# Altium PCB UPCR_TEC_module.PcbDoc
Units mm, origin at the board's own origin, x right, y up, seen from the top; angles counter-clockwise.
Board outline 70 x 50 mm, 2 copper layers (Top Layer, Bottom Layer); 49 components, 37 nets, 186 pads, 149 vias.
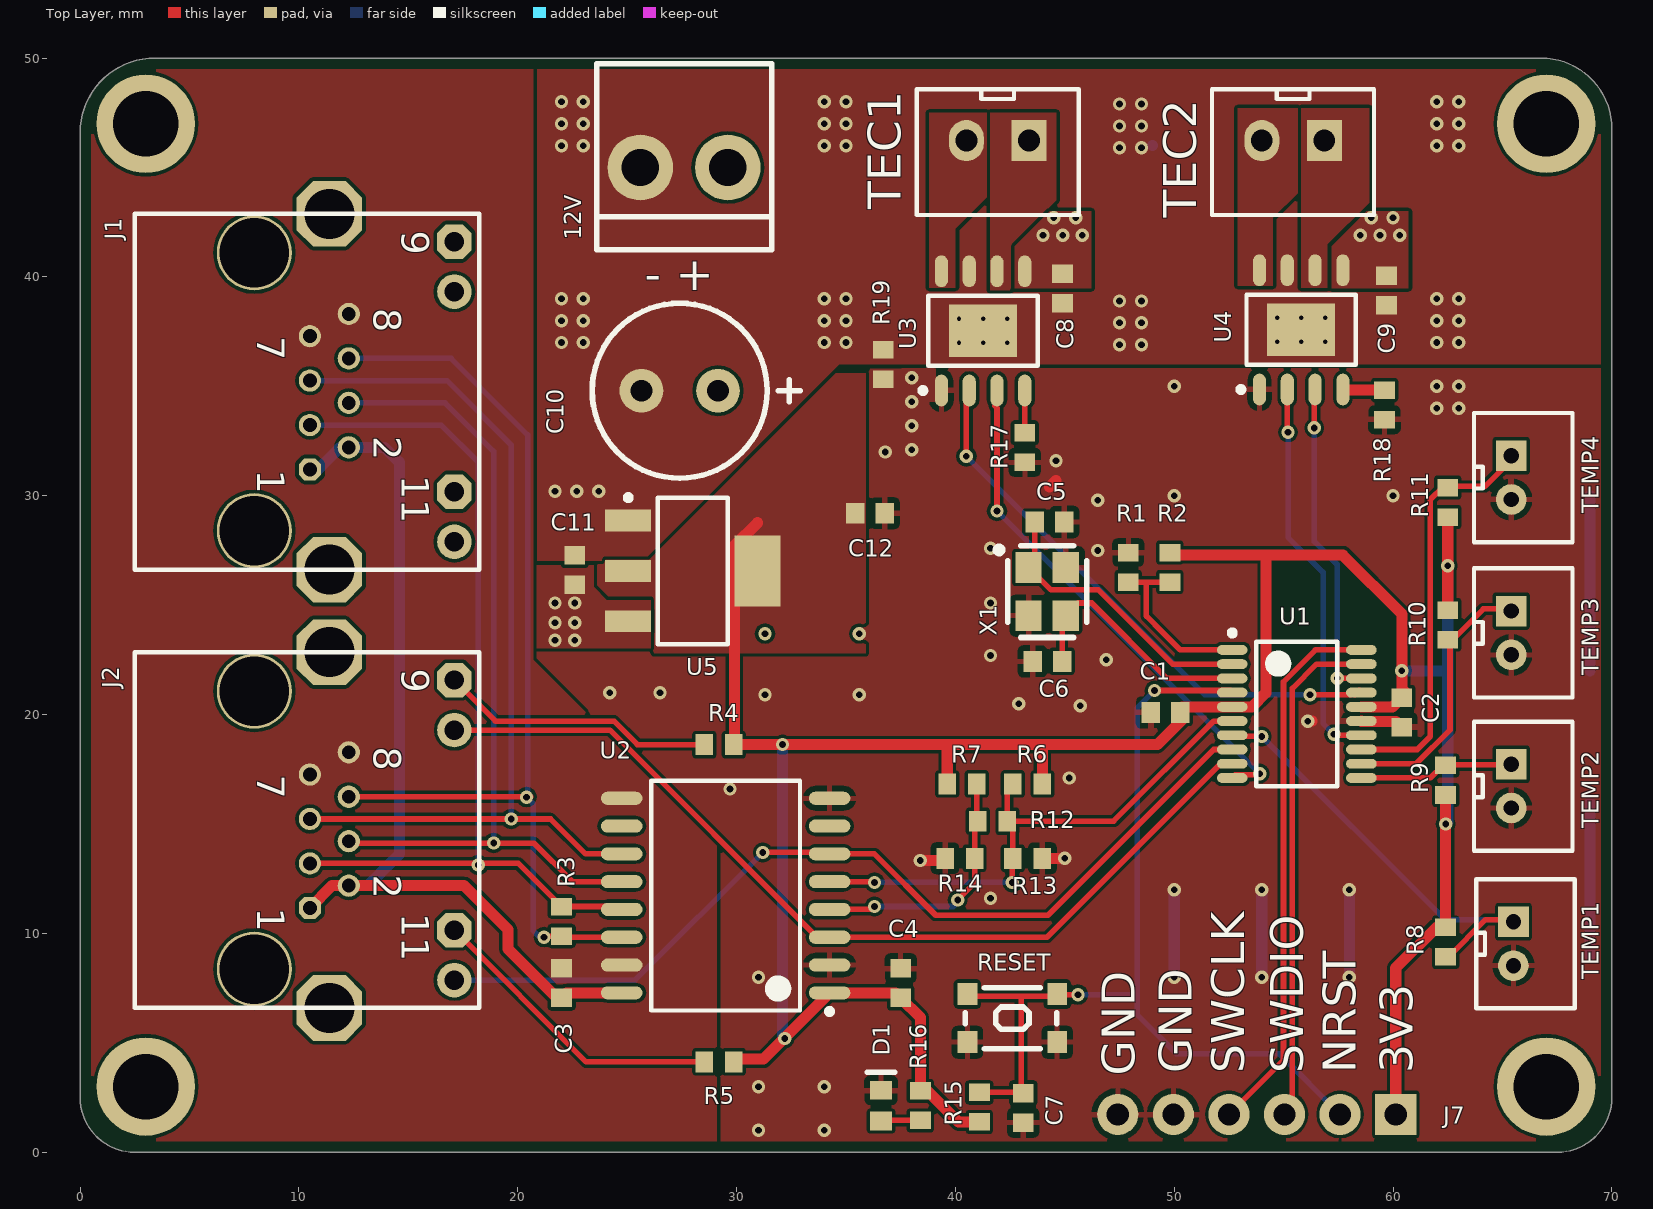
[diagram p0: Top Layer view]
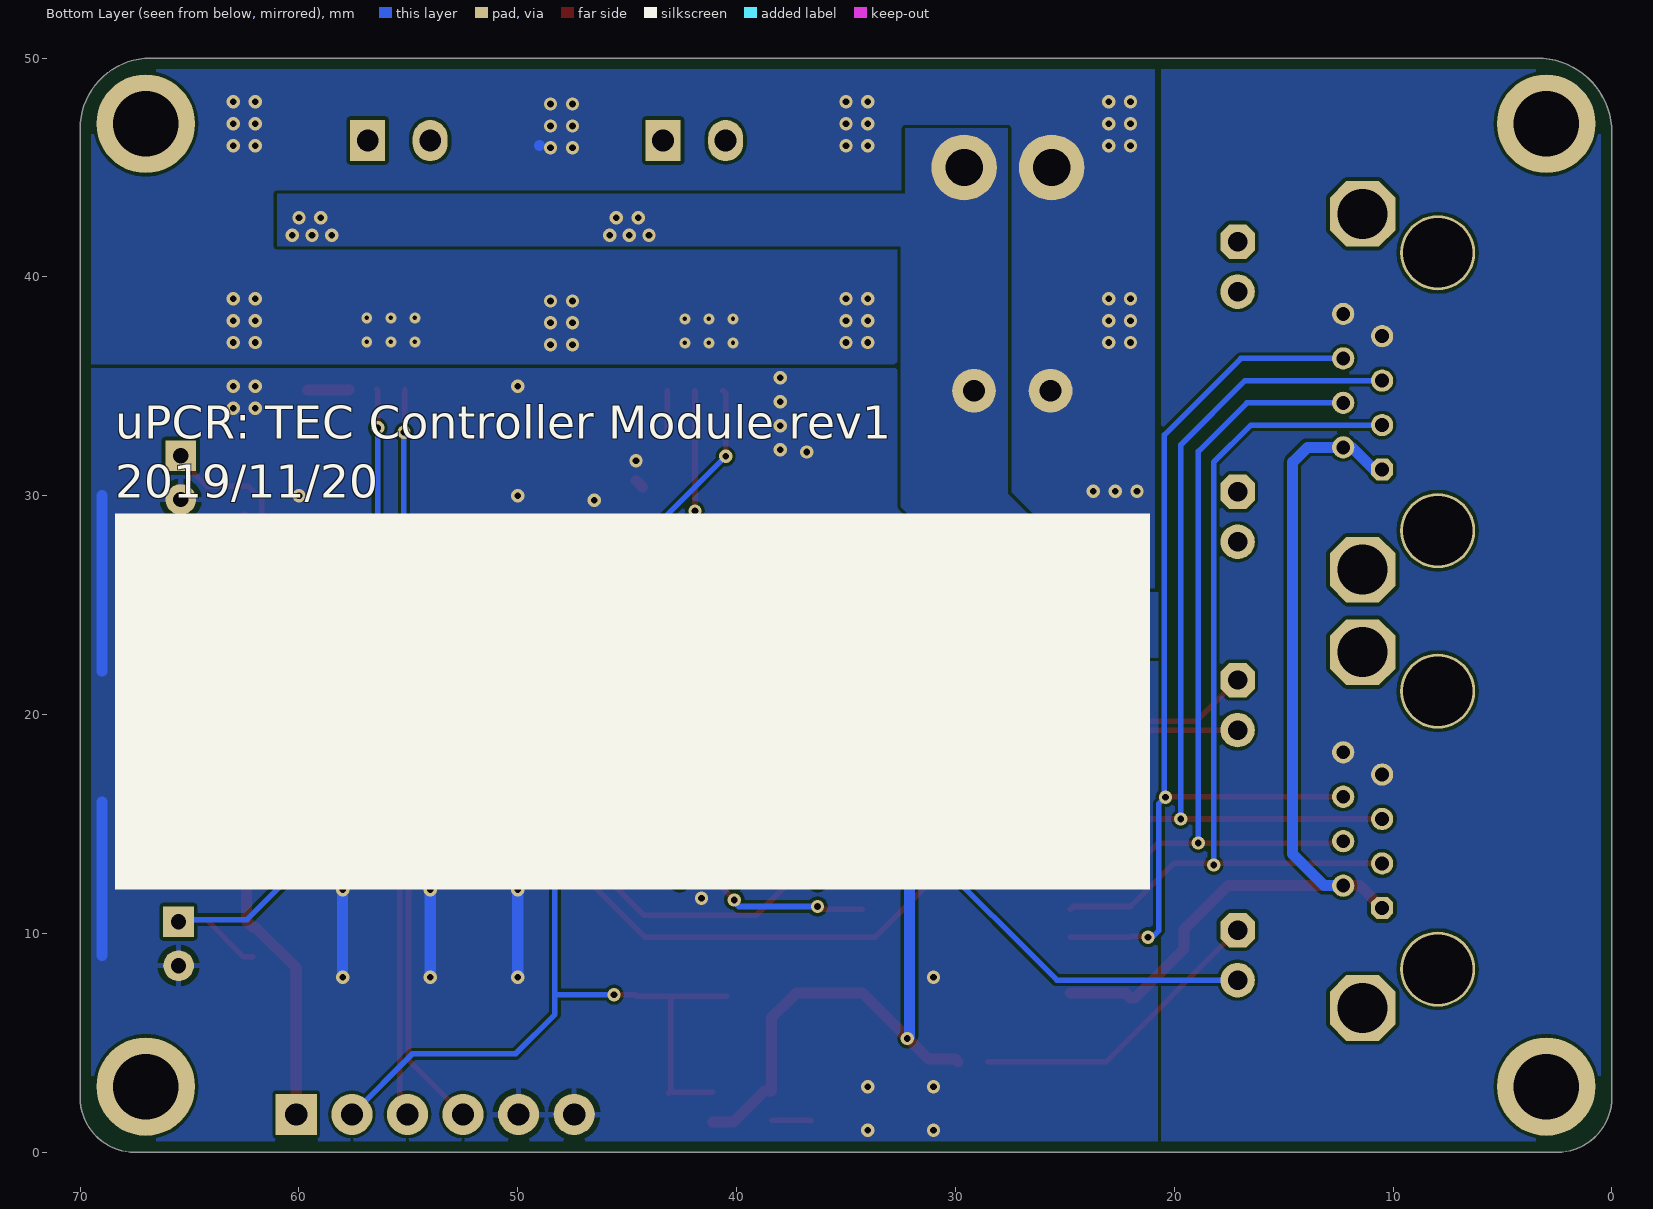
[diagram p1: Bottom Layer view, seen from below]
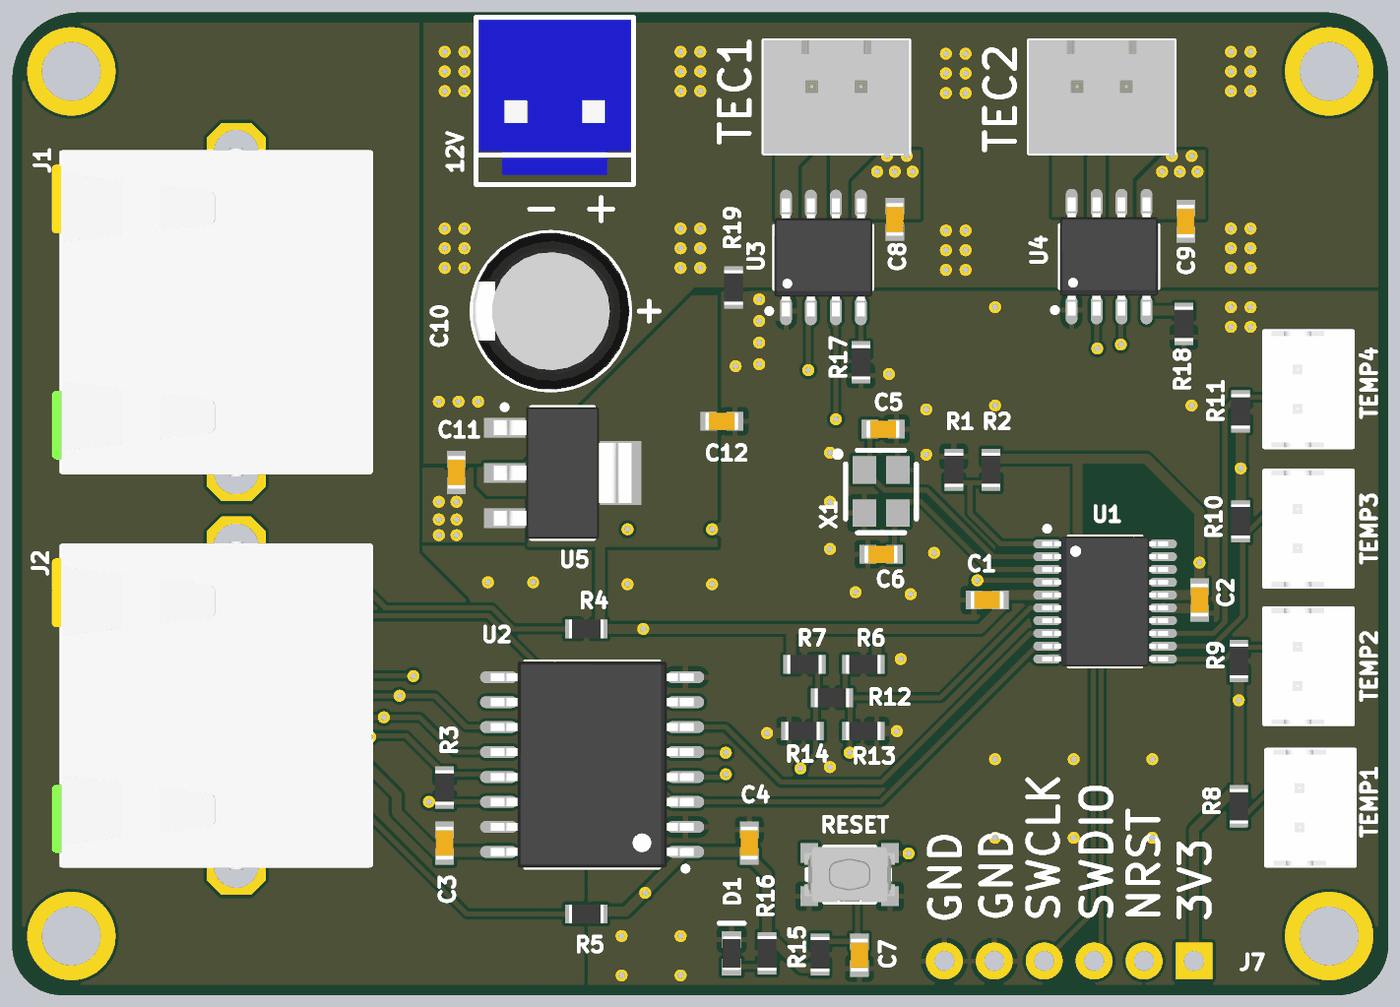
[diagram p2: 3D render of the assembled board from above, using the file's embedded part models]

## Layer stack, top to bottom
Top Solder: solder mask 0.0102, Solder Resist, Dk 3.5
Top Layer: signal copper 0.0356
Dielectric 1: dielectric 0.32, FR-4, Dk 4.8
Bottom Layer: signal copper 0.0356
Bottom Solder: solder mask 0.0102, Solder Resist, Dk 3.5

## Board outline
2.5,0 cw(c2.5,2.5) 0,2.5 0,46.586 cw(c3.414,46.586) 3.414,50 66.775,50 cw(c66.775,46.775) 70,46.775 70,2.5 cw(c67.5,2.5) 67.5,0

## Design rules (kind name [scope] priority, off if disabled: settings)
BoardOutlineClearance [All] p1: gap=0.5 ignorepadtopadclearanceinfootprint=FALSE
Clearance [All] p1: gap=0.152 ignorepadtopadclearanceinfootprint=FALSE except(0: Arc-Hole Track-Hole SMDPad-Hole THPad-Hole Via-Hole Fill-Hole Poly-Hole Region-Hole Text-Hole)
HoleSize [All] p1: absolutevalues=TRUE maxlimit=4 minlimit=0.025 maxpercent=80.000 minpercent=20.000
PolygonConnect PolygonConnect_3 [All vs IsNamedPolygon('GND_L01_P030')] p1: thpad.connectstyle=Relief thpad.reliefconductorwidth=0.254 thpad.reliefentries=4 thpad.polygonreliefangle="90 Angle" thpad.airgapwidth=0.254 smdpad.connectstyle=Relief smdpad.reliefconductorwidth=0.254 smdpad.reliefentries=4 smdpad.polygonreliefangle="90 Angle" smdpad.airgapwidth=0.254 via.connectstyle=Direct via.reliefconductorwidth=0.254 via.reliefentries=4 via.polygonreliefangle="90 Angle" via.airgapwidth=0.254
PolygonConnect PolygonConnect_2 [All vs IsNamedPolygon('GND_L01_P030')] p2: thpad.connectstyle=Relief thpad.reliefconductorwidth=0.254 thpad.reliefentries=4 thpad.polygonreliefangle="90 Angle" thpad.airgapwidth=0.254 smdpad.connectstyle=Direct smdpad.reliefconductorwidth=0.254 smdpad.reliefentries=4 smdpad.polygonreliefangle="90 Angle" smdpad.airgapwidth=0.254 via.connectstyle=Relief via.reliefconductorwidth=0.254 via.reliefentries=4 via.polygonreliefangle="90 Angle" via.airgapwidth=0.254
PolygonConnect PolygonConnect_1 [All vs IsNamedPolygon('GND_L02_P034')] p3: thpad.connectstyle=Relief thpad.reliefconductorwidth=0.254 thpad.reliefentries=4 thpad.polygonreliefangle="90 Angle" thpad.airgapwidth=0.254 smdpad.connectstyle=Relief smdpad.reliefconductorwidth=0.254 smdpad.reliefentries=4 smdpad.polygonreliefangle="90 Angle" smdpad.airgapwidth=0.254 via.connectstyle=Direct via.reliefconductorwidth=0.254 via.reliefentries=4 via.polygonreliefangle="90 Angle" via.airgapwidth=0.254
PolygonConnect [All] p4: connectstyle=Direct reliefconductorwidth=0.254 reliefentries=4 polygonreliefangle="90 Angle" airgapwidth=0.254
RoutingVias [All] p1: holewidth=0.305 width=0.61 viastyle="Through Hole" minholewidth=0.305 minwidth=0.61 maxholewidth=0.305 maxwidth=0.61
SolderMaskExpansion [IsVia] p1: expansion=0 soldermaskfromhole=TRUE
Width [All] p1: maxlimit=1.016 minlimit=0.254 preferedwidth=0.254
29 further rules are at their usual default settings.

## Components (designator, comment, footprint, x,y, rotation, side; value= is the part's Value field where it differs from the comment)
12V "CONN_2P" "JST B2P-VH" 27.6,45 r0 top
C1 "C" C0603 49.6,20.1 r0 top value=100nF
C2 "C" C0603 60.4,20.1 r90 top value=100nF
C3 "C" C0603 22,7.729 r270 top value=100nF
C4 "C" C0603 37.5,7.729 r90 top value=100nF
C5 "C" C0603 44.3,28.8 r180 top value=18pF
C6 "C" C0603 44.2,22.429 r0 top value=18pF
C7 "C" C0603 43.1,2.029 r90 top value=100nF
C8 "C" C0603 44.9,39.475 r90 top value=100nF
C9 "C" C0603 59.7,39.375 r90 top value=100nF
C10 "47uF" CPOL_8x9 27.4,34.8 r270 top
C11 "C" C0603 22.6,26.6 r270 top value=100nF
C12 "C" C0603 36.1,29.2 r180 top value=100nF
D1 "LED" "0603 LED" 36.6,2.129 r90 top
J1 "RJ45_CONN" RJ45_CONN_V1 14.328,34.716 r270 top
J2 "RJ45_CONN" RJ45_CONN_V1 14.328,14.684 r270 top
J7 "CONN_6P" "2.54 6P Header" 60.12,1.729 r180 top
R1 "R" R0603 47.9,26.729 r90 top value=0R
R2 "R" R0603 49.8,26.729 r90 top value=DNP
R3 "R" R0603 22,10.554 r270 top value=120R
R4 "R" R0603 29.2,18.629 r0 top value=3.3K
R5 "R" R0603 29.2,4.129 r0 top value=3.3K
R6 "R" R0603 43.3,16.829 r180 top value=DNP
R7 "R" R0603 40.3,16.829 r0 top value=DNP
R8 "R" R0603 62.4,9.6 r270 top value=10k/0.1%
R9 "R" R0603 62.4,17 r90 top value=10k/0.1%
R10 "R" R0603 62.5,24.1 r270 top value=10k/0.1%
R11 "R" R0603 62.5,29.7 r90 top value=10k/0.1%
R12 "R" R0603 41.7,15.129 r0 top value=DNP
R13 "R" R0603 43.3,13.429 r0 top value=DNP
R14 "R" R0603 40.2,13.429 r180 top value=DNP
R15 "R" R0603 41.097,2.059 r90 top value=10K
R16 "R" R0603 38.4,2.129 r90 top value=3.3K
R17 "R" R0603 43.17,32.199 r90 top value=20k
R18 "R" R0603 59.61,34.15 r90 top value=20k
R19 "R" R0603 36.7,36 r270 top value=0R
RESET "KMR2" KMR2_tact_switch 42.6,6.129 r180 top
TEC1 "CONN_2P" "JST B2B-XH-A - THIN PADS" 43.178,46.229 r180 top
TEC2 "CONN_2P" "JST B2B-XH-A - THIN PADS" 56.678,46.229 r180 top
TEMP1 "CONN_2P" "JST B2B-PH-K-S" 65.5,10.529 r270 top
TEMP2 "CONN_2P" "JST B2B-PH-K-S" 65.4,17.729 r270 top
TEMP3 "CONN_2P" "JST B2B-PH-K-S" 65.4,24.729 r270 top
TEMP4 "CONN_2P" "JST B2B-PH-K-S" 65.4,31.829 r270 top
U1 "STM32F030F4" "STM32F030F4- TSSOP20" 55.6,20.029 r0 top
U2 "ADM2484E" ADM2484-SOIC16 29.5,11.729 r180 top
U3 "DRV8871" "DRV8871- SOIC8" 41.265,37.533 r90 top
U4 "DRV8871" "DRV8871- SOIC8" 55.8,37.579 r90 top
U5 "LM1117 3.3v" SOT223 27.998,26.565 r0 top
X1 "8MHz" CRYSTAL_4P_3.2X2.5 44.195,25.623 r270 top

## Footprints (in the part's own frame and the unit in brackets; to place one, negate y for a bottom-side part, rotate by r counter-clockwise, add the part's x,y. Pads: shape width x height; smd on the part's side, far side on the other; paste and mask are expansions set on the pad)
"2.54 6P Header" [mil] "2.54 6P Header"
  rect 74x74 hole 40: 1(0,0)
  round 74 hole 40: 2(100,0) 3(200,0) 4(300,0) 5(400,0) 6(500,0)
"0603 LED" [mm]
  rect 0.85x1 smd: 1(-0.7,0) 2(0.7,0)
  silkscreen extent 1.52,-0.63 1.52,0.64, body extent -0.87,-0.48 0.87,0.48, height 0.6
ADM2484-SOIC16 [mm] "SOIC, 16-Leads, Body 10.30x7.50mm, Pitch 1.27mm, IPC Medium Density"
  oval 1.9x0.6 smd: 1(-4.75,4.445) 2(-4.75,3.175) 3(-4.75,1.905) 4(-4.75,0.635) 5(-4.75,-0.635) 6(-4.75,-1.905) 7(-4.75,-3.175) 8(-4.75,-4.445) 9(4.75,-4.445) 10(4.75,-3.175) 11(4.75,-1.905) 12(4.75,-0.635) 13(4.75,0.635) 14(4.75,1.905) 15(4.75,3.175) 16(4.75,4.445)
  silkscreen extent -4.88,-5.25 3.4,5.42, body extent -5.16,-5.25 5.16,5.25, height 2.65
C0603 [mm] "Chip Capacitor, 2-Leads, Body 1.60x0.80mm, IPC Medium Density"
  rect 0.85x0.95 smd: 1(-0.675,0) 2(0.675,0)
  body extent -0.85,-0.45 0.85,0.45, height 0.6
CPOL_8x9 [mm] "Electrolytic Capacitor, through hole, 8x9mm"
  round 2 hole 1: 1(0,1.75) 2(0,-1.75)
  silkscreen extent -4,-4 4,5.5, body extent -4,-4 4,4, height 9
CRYSTAL_4P_3.2X2.5 [mm] "CRYSTAL 4P 3.2X2.0"
  rect 1.4x1.2 smd: 1(-1.1,-0.85) 2(1.1,-0.85) 3(1.1,0.85) 4(-1.1,0.85)
  silkscreen extent -2.1,-2.34 2.1,1.8
"DRV8871- SOIC8" [mm] "SOIC, 8-Leads, Body 4.90x3.90mm, Pitch 1.27mm, Thermal Pad 3.10x2.40mm, IPC Medium Density"
  oval 1.45x0.6 smd: 1(-2.725,1.905) 2(-2.725,0.635) 3(-2.725,-0.635) 4(-2.725,-1.905) 5(2.725,-1.905) 6(2.725,-0.635) 7(2.725,0.635) 8(2.725,1.905)
  rect 2.4x3.1 smd: 9(0,0)
  silkscreen extent -2.85,-2.5 1.6,2.88, body extent -3,-2.5 3,2.5, height 1.7
"JST B2B-PH-K-S" [mm] "2 PIN LOCKING HEADER 2.0mm PITCH"
  rect 1.4x1.4 hole 0.7: 1(0,0)
  round 1.4 hole 0.7: 2(2,0)
  silkscreen extent -1.95,-1.7 3.95,2.8, body extent -1.95,-1.7 3.95,2.8, height 6
"JST B2B-XH-A - THIN PADS" [mm] "2 PIN LOCKING HEADER 2.5mm PITCH"
  rect 1.6x1.88 hole 1: 1(-0.178,0)
  oval 1.6x1.88 hole 1: 2(2.678,0)
  silkscreen extent -2.45,-2.35 4.95,3.4, body extent -2.45,-2.35 4.95,3.4, height 7
"JST B2P-VH" [mm]
  round 3 hole 1.7: 1(-2,0) 2(2,0)
  silkscreen extent -4,-3.75 4,4.75, body extent -3.93,-3.75 3.93,4.75, height 3.7
KMR2_tact_switch [mm] "Microminiature SMT Top Actuated"
  rect 0.9x1 smd: 1(-2.05,1.1) 1(2.05,1.1) 2(-2.05,-1.1) 2(2.05,-1.1)
  silkscreen extent -2.03,-1.4 2.16,1.4, body extent -2.3,-1.4 2.3,1.4, height 1.92
R0603 [mm]
  rect 0.8x0.95 smd: 1(-0.675,0) 2(0.675,0)
  body extent -0.87,-0.48 0.87,0.48, height 0.45
RJ45_CONN_V1 [mil]
  oct 40x40 hole 25: 1(138.53,-150.73)
  round 40 hole 25: 2(98.53,-80.73) 3(58.53,-150.73) 4(18.53,-80.73) 5(-21.47,-150.73) 6(-61.47,-80.73) 7(-101.47,-150.73) 8(-141.47,-80.73)
  oct 62x62 hole 35: 9(-271.47,109.27) 11(178.53,109.27)
  round 62 hole 35: 10(-181.47,109.27) 12(268.53,109.27)
  oct 118.11x118.11 hole 90: 13(-321.47,-115.73) 14(318.53,-115.73)
  round 135 hole 125: BO1(-251.47,-250.73) BO2(248.53,-250.73)
  silkscreen extent -321,-466 319,154, body extent -330,-485 327,154, height 581
SOT223 [mm] "SOT223, 4-Leads, Body 6.50x7.00mm (avg), Pitch 2.30mm, IPC Medium Density"
  rect 2.1x1 smd: 1(-2.95,2.3) 2(-2.95,0) 3(-2.95,-2.3)
  rect 2.1x3.25 smd: 4(2.95,0)
  silkscreen extent -3.07,-3.35 1.6,3.47, body extent -3.5,-3.35 3.5,3.35, height 1.8
"STM32F030F4- TSSOP20" [mm] "TSOP, 20-Leads, Body 6.50x4.40mm, Pitch 0.65mm, IPC Medium Density"
  oval 1.4x0.45 smd: 1(-2.95,2.925) 2(-2.95,2.275) 3(-2.95,1.625) 4(-2.95,0.975) 5(-2.95,0.325) 6(-2.95,-0.325) 7(-2.95,-0.975) 8(-2.95,-1.625) 9(-2.95,-2.275) 10(-2.95,-2.925) 11(2.95,-2.925) 12(2.95,-2.275) 13(2.95,-1.625) 14(2.95,-0.975) 15(2.95,-0.325) 16(2.95,0.325) 17(2.95,0.975) 18(2.95,1.625) 19(2.95,2.275) 20(2.95,2.925)
  silkscreen extent -3.07,-3.3 1.85,3.82, body extent -3.2,-3.3 3.2,3.3, height 1.2

## Part data
12V TEC1 TEC2 TEMP1 TEMP2 TEMP3 TEMP4: "Connector, 2P"
C1 C2 C3 C4 C5 C6 C7 C8 C9 C11 C12: "Ceramic Capacitor SMD"
C10: library part C_POL, "Polarized Capacitor"
J7: "Connector, 6P"
R1 R2 R3 R4 R5 R6 R7 R8 R9 R10 R11 R12 R13 R14 R15 R16 R17 R18 R19: "Resistor SMD"
RESET: library part TACT_SWITCH, "Pushbuttons"
U2: "Isolated RS485/RS-422 transciever"
U3 U4: "DRV8871 3.6-A Brushed DC Motor Driver With Internal Current Sense (PWM Control)"
U5: "800 mA 3.3V Low Dropout Linear Voltage Regulator"
X1: library part Crystal_4, "Crystal Oscillator"

## Free pads (board coordinates)
  round 4.5 hole 3: 2(3,3) 2(3,47) 2(67,3) 2(67,47)

## Via types
v1: diameter 0.61, hole 0.305, Top Layer to Bottom Layer, 137 vias
v2: diameter 0.5, hole 0.2, Top Layer to Bottom Layer, 12 vias

## Nets (pads, with @x,y where several pads share a name; then routed paths per layer and width w, separated by ;. In a path a pad name is that pad's centre, name@x,y a point inside that pad or via, vN(x,y) a via of type N, cw(c..) or ccw(c..) an arc to the next point about the centre after c; other vN are vias at no path point)
3V3: C1.2 C2.2 C4.1 C12.2 J7.1 R2.2 R4.2 R5.2 R6.1 R7.1 R8.1 R9.1 R10.1 R11.1 R15.1 R16.2 U1.5 U1.16 U2.1 U5.2 U5.4 | length 127.9
  Top Layer w0.508: R5.2 30,4.254 31.22,4.254 U2.1 37.27,7.284 C4.1 38.4,6.154 R16.2 38.725,2.804 40.145,1.384 R15.1 ; R4.2 R4.2@29.9,18.629 ; 30.948,28.765 29.9,27.717 R4.2@29.9,18.629 ; R7.1 39.625,18.629 ; R6.1 43.975,18.629 ; R2.2 49.904,27.3 54.2,27.3 ; U1.16 59.979,20.354 C2.2 60.6,20.975 60.4,21.175 v1(60.4,22) 60.4,24.6 57.7,27.3 54.2,27.3 ; J7.1 60.12,8.42 R8.1@62,10.3 ; R8.1@62.1,10.275 62.4,10.575 v1(62.4,15) R9.1@62.4,16.354 ; R10.1 v1@62.5,26.9 ; v1@62.5,27 R11.1 ; R4.2@29.9,18.629 v1(32.1,18.629) 39.625,18.629 ; 39.625,18.629 43.975,18.629 ; 43.975,18.629 49.229,18.629 50.35,19.75 50.35,20.354 U1.5 53.554,20.354 54.2,21 54.2,27.3
  Bottom Layer w0.508: v1(32.1,18.629) 32.1,5.3 v1(32.2,5.2) ; v1(60.4,22) 62.5,22 62.5,15.102 62.4,15.002 v1(62.4,15) ; 62.5,22.1 v1(62.5,26.8)
12V: 12V.2 C8.2 C9.2 C10.1 C11.2 U3.5 U4.5 U5.3
  other v1: 21.7,23.4 22.6,23.4 21.7,24.2 22.6,24.2 21.7,25.1 22.6,25.1 44,41.9 44.9,41.9 45.8,41.9 58.5,41.9 59.4,41.9 60.3,41.9 44.5,42.7 45.5,42.7 59,42.7 60,42.7
"422 DE": R6.2 R12.2 R13.1 U1.6 U2.5 | length 25.3
  Top Layer w0.254: U2.5 36.265,12.364 v1(36.3,12.329) ; v1(42.6,12.329) 42.6,13.404 R13.1 42.625,14.879 R12.2 ; R6.2 42.375,16.579 R12.2 ; U1.6 51.804,19.704 47.229,15.129 R12.2
  Bottom Layer w0.254: v1(36.3,12.329) v1(42.6,12.329)
"422 nRE": R7.2 R12.1 R14.1 U2.4 | length 11.8
  Top Layer w0.254: U2.4 36.165,11.094 v1(36.3,11.229) ; v1(40.1,11.529) 40.875,12.304 R14.1 40.875,14.979 40.975,15.079 R7.2
  Bottom Layer w0.254: v1(36.3,11.229) 39.9,11.229 40.1,11.429 v1(40.1,11.529)
"422 RxD": J2.10 U1.9 U2.3 | length 42.8
  Top Layer w0.254: J2.10 24.207,19.293 33.676,9.824 U2.3 44.182,9.824 52.112,17.754 U1.9
"422 TxD": J2.12 U1.8 U2.6 | length 42.3
  Top Layer w0.254: v1(31.2,13.7) 34.434,13.7 34.5,13.634 36.295,13.634 39.1,10.829 44.229,10.829 51.804,18.404 U1.8
  Bottom Layer w0.254: J2.12 25.363,7.863 v1(31.2,13.7)
422_A: J1.6 J2.6 R3.2 U2.14 | length 45.1
  Top Layer w0.254: J2.6 20.584,16.245 20.568,16.229 v1(20.4,16.229) ; v1(21.2,9.829) 21.25,9.879 R3.2 22.055,9.824 U2.14
  Bottom Layer w0.254: J1.6 16.952,36.277 20.45,32.779 20.45,16.279 v1(20.4,16.229) 20.7,15.929 20.7,10.129 21,9.829 v1(21.2,9.829)
422_B: J1.3 J2.3 R3.1 U2.13 | length 41.8
  Top Layer w0.254: J2.3@10.6,13.197 20.032,13.197 R3.1 24.615,11.229 U2.13
  Bottom Layer w0.254: J1.3 16.5,33.229 18.2,31.53 v1(18.2,13.129)
422_Y: J1.5 J2.5 U2.11 | length 42.4
  Top Layer w0.254: J2.5 21.5,15.229 23.095,13.634 U2.11
  Bottom Layer w0.254: J1.5 16.768,35.261 19.7,32.329 v1(19.7,15.229)
422_Z: J1.4 J2.4 U2.12 | length 38.8
  Top Layer w0.254: J2.4 12.462,14.029 12.562,14.129 v1(18.9,14.129) 20.732,14.129 22.497,12.364 U2.12
  Bottom Layer w0.254: J1.4 16.684,34.245 18.9,32.029 v1(18.9,14.129)
+5V: C3.2 J1.1 J1.2 J2.1 J2.2 U2.16 | length 43
  Top Layer w0.508: J2.1 11.516,12.181 J2.2 17.548,12.181 19.559,10.17 19.559,9.289 20.059,8.789 21.794,7.054 C3.2 22.23,7.284 U2.16
  Bottom Layer w0.508: J1.1 10.868,31.197 11.884,32.213 J1.2 13.916,32.213 14.6,31.529 14.6,13.629 13.152,12.181 J2.2
GND: C1.1 C2.1 C4.2 C5.1 C6.1 C7.1 C12.1 D1.2 J7.5 J7.6 R1.2 R13.2 R14.2 R17.1 R18.1 R19.2 RESET.1 TEMP1.2 TEMP2.2 TEMP3.2 TEMP4.2 U1.15 U2.2 U2.8 U3.1 U4.1 X1.2 X1.4 | length 31.8
  Top Layer w0.508: v1(38.4,13.329) 39.425,13.329 R14.2 ; R13.2 v1(45,13.429) ; 44.294,30.4 44.6,30.706 ; v1(56.1,19.7) v1@56.3,19.7 ; U1.15@58.55,19.694 58.56,19.694 58.569,19.686 60.139,19.686 C2.1
  Bottom Layer w0.508: v1(50,8) v1(50,12) ; v1(54,8) v1(54,12) ; v1(58,8) v1(58,12) ; 69,9 69,16 ; 69,22 69,30
  other v1: 31,1 34,1 31,3 34,3 31,8 41.6,11.6 29.7,16.6 45.2,17.1 45.7,20.4 42.9,20.5 31.3,20.9 35.6,20.9 24.2,21 26.5,21 46.9,22.5 41.6,22.7 31.3,23.7 35.6,23.7 41.6,25.1 46.5,27.5 41.6,27.6 46.5,29.8 50,30 60,30 44.6,31.6 36.8,32 38,32.1 38,33.2 62,34 63,34 38,34.3 50,35 62,35 63,35 38,35.4
GND1: C3.1 J1.7 J1.8 J2.7 J2.8 U2.9 U2.15
NetC5_2: C5.2 U1.2 X1.1 | length 13.3
  Top Layer w0.254: C5.2 43.625,27.003 X1.1 44.368,25.7 46.529,25.7 49.925,22.304 U1.2
NetC6_2: C6.2 U1.3 X1.3 | length 11.4
  Top Layer w0.254: C6.2 44.875,24.353 X1.3 45.622,25.1 46.229,25.1 49.675,21.654 U1.3
NetD1_1: D1.1 R16.1 | length 1.8
  Top Layer w0.254: D1.1 36.625,1.454 R16.1
NetJ2_9: J2.9 R4.1 | length 12.6
  Top Layer w0.254: J2.9 18.984,19.7 24.4,19.7 25.471,18.629 R4.1
NetJ2_11: J2.11 R5.1 | length 13.9
  Top Layer w0.254: J2.11 23.124,4.129 R5.1
NetR1_1: R1.1 R2.1 U1.1 | length 8
  Top Layer w0.254: R1.1 48.725,26.054 ; R2.1 48.725,26.054 ; U1.1 50.275,22.954 49.475,23.754 48.725,24.504 48.725,26.054
NetR17_2: R17.2 U3.4 | length 1.9
  Top Layer w0.254: R17.2 U3.4
NetR18_2: R18.2 U4.4 | length 1.9
  Top Layer w0.508: U4.4 57.734,34.825 R18.2
NetTEC1_1: TEC1.1 U3.6
NetTEC1_2: TEC1.2 U3.8
NetTEC2_1: TEC2.1 U4.6
NetTEC2_2: TEC2.2 U4.8
NRST: C7.2 J7.2 R15.2 RESET.2 U1.4 | length 44.2
  Top Layer w0.254: RESET.2@40.45,7.129 43,7.129 ; R15.2 C7.2@43.07,2.734 ; C7.2 C7.2@43.07,2.734 ; v1(45.6,7.2) 44.679,7.2 44.65,7.229 44.55,7.129 43,7.129 ; v1(49.1,21.1) 52.554,21.1 U1.4 ; 43,7.129 43,2.804 C7.2@43.07,2.734
  Bottom Layer w0.254: v1(45.6,7.2) 48.3,7.2 ; v1(49.1,21.1) 48.3,20.3 48.3,7.2 ; J7.2 54.809,4.5 50.1,4.5 48.3,6.3 48.3,7.2
PGND: 12V.1 C8.1 C9.1 C10.2 C11.1 R19.1 U3.7 U3.9 U4.7 U4.9 U5.1 | length 0
  other v1: 21.7,30.2 22.7,30.2 23.7,30.2 47.5,36.9 48.5,36.9 22,37 23,37 34,37 35,37 62,37 63,37 47.5,37.9 48.5,37.9 22,38 23,38 34,38 35,38 62,38 63,38 47.5,38.9 48.5,38.9 22,39 23,39 34,39 35,39 62,39 63,39 47.5,45.9 48.5,45.9 22,46 23,46 34,46 35,46 62,46 63,46 47.5,46.9 48.5,46.9 22,47 23,47 34,47 35,47 62,47 63,47 47.5,47.9 48.5,47.9 22,48 23,48 34,48 35,48 62,48 63,48
  other v2: 40.165,36.983 41.265,36.983 42.365,36.983 54.7,37.029 55.8,37.029 56.9,37.029 40.165,38.083 41.265,38.083 42.365,38.083 54.7,38.129 55.8,38.129 56.9,38.129
PWM1: U1.10 U3.3 | length 23.9
  Top Layer w0.254: v1(41.9,29.3) 41.9,34.008 41.8,34.108 41.9,34.208 U3.3 ; U1.10 52.796,17.25 53.85,17.25 v1(53.9,17.3)
  Bottom Layer w0.254: v1(41.9,29.3) v1(53.9,17.3)
PWM2: U1.17 U3.2 | length 25.8
  Top Layer w0.254: v1(40.5,31.8) 40.5,34.678 U3.2 ; v1(56.2,20.9) 58.054,20.9 58.154,21 58.254,20.9 58.454,21.1 U1.17
  Bottom Layer w0.254: v1(40.5,31.8) 51.4,20.9 v1(56.2,20.9)
PWM3: U1.18 U4.3 | length 14.7
  Top Layer w0.254: v1(56.4,33.1) 56.4,34.819 U4.3 ; v1(57.454,21.654) U1.18
  Bottom Layer w0.254: v1(56.4,33.1) 56.4,27.9 57.454,26.846 v1(57.454,21.654)
PWM4: U1.14 U4.2 | length 18
  Top Layer w0.254: U4.2 55.165,32.935 v1(55.2,32.9) ; v1(57.3,19.1) 57.291,19.1 57.246,19.054 U1.14
  Bottom Layer w0.254: v1(55.2,32.9) 55.2,28.1 56.8,26.5 56.8,19.6 v1(57.3,19.1)
SWCLK: J7.4 U1.20 | length 25
  Top Layer w0.254: J7.4 54.994,4.223 54.994,21.494 56.454,22.954 U1.20
SWDIO: J7.3 U1.19 | length 23.2
  Top Layer w0.254: J7.3 55.4,2.089 55.4,21.2 56.504,22.304 U1.19
T1: R8.2 TEMP1.1 U1.7 | length 21
  Top Layer w0.254: U1.7 52.704,19 v1(54,19) ; R8.2@62.1,8.925 62.525,8.925 64.229,10.629 TEMP1.1@65.8,10.629
  Bottom Layer w0.254: v1(54,19) 62.371,10.629 TEMP1.1@65.8,10.629
T2: R9.2 TEMP2.1 U1.11 | length 7.5
  Top Layer w0.254: U1.11 61.7,17.104 62.3,17.704 65.575,17.704 TEMP2.1@65.7,17.829
T3: R10.2 TEMP3.1 U1.12 | length 12.4
  Top Layer w0.254: U1.12 61.054,17.754 62.6,19.3 62.6,23.3 64.129,24.829 TEMP3.1@65.7,24.829
T4: R11.2 TEMP4.1 U1.13 | length 19.1
  Top Layer w0.254: U1.13 61.104,18.404 61.7,19 61.7,29.825 62.3,30.425 64.196,30.425 TEMP4.1@65.7,31.929
pads on no net: J1.9 J1.10 J1.11 J1.12 J1.13 J1.14 J1.BO1 J1.BO2 J2.13 J2.14 J2.BO1 J2.BO2 U2.7 U2.10

## Polygon pours and split planes (outlines as drawn)
GND on Bottom Layer "GND_L02_P034" (solid, remove dead copper, pour order 34): -0.059,49.6 70,49.559 70,-0.4 0,-0.4
GND1 on Bottom Layer "GND1_L02_P032" (solid, remove dead copper, pour order 32): 20.6,-0.371 20.6,22.4 20.6,49.6 -0.2,49.6 -0.1,49.5 -0.1,-0.271
12V on Bottom Layer "12V_L02_P002" (solid, remove dead copper, pour order 2): 27.6,43.8 27.6,35.8 32.5,35.8 32.5,41.4 61,41.4 61,43.8
12V on Bottom Layer "12V_L02_P016" (solid, remove dead copper, pour order 16): 20.735,25.6 23.1,25.6 27.6,30.1 27.6,35.8 32.5,35.8 32.5,29.5 25.6,22.6 20.735,22.6
12V on Bottom Layer "12V_L02_P024" (solid, remove dead copper, pour order 24): 27.6,43.6 27.6,46.8 32.3,46.8 32.3,43.6
PGND on Bottom Layer "PGND_L02_P026" (solid, remove dead copper, pour order 26): 20.9,25.6 20.9,49.7 21,49.6 70,49.6 70,36 32.7,36 32.7,31.4 26.9,25.6
GND on Top Layer "GND_L01_P030" (solid, remove dead copper, pour order 30): 15.9,49.4 15.9,0.1 16.4,-0.4 70,-0.4 70,49.6
3V3 on Top Layer "3V3_L01_P028" (solid, remove dead copper, pour order 28): 20.9,35.6 35.9,35.6 35.9,22.8 20.9,22.8
GND on Top Layer "GND_L01_P036" (solid, remove dead copper, pour order 36): 36,35.8 39.1,35.8 39.1,34.3 36,34.3
12V on Top Layer "12V_L01_P004" (solid, remove dead copper, pour order 4): 42.7,41.4 44.3,43 46.2,43 46.2,39.485 42.7,39.485
12V on Top Layer "12V_L01_P006" (solid, remove dead copper, pour order 6): 57.2,41.4 58.8,43 60.7,43 60.7,39.485 57.2,39.485
NetTEC1_1 on Top Layer "NETTEC1_1_L01_P008" (solid, remove dead copper, pour order 8): 41.6,47.5 44.6,47.5 44.6,43.5 42.6,41.5 42.6,39.4 41.6,39.4
NetTEC1_2 on Top Layer "NETTEC1_2_L01_P010" (solid, remove dead copper, pour order 10): 41.5,47.5 38.8,47.5 38.8,41.2 38.8,39.5 40,39.5 40,42.2 41.5,43.7
NetTEC2_1 on Top Layer "NETTEC2_1_L01_P012" (solid, remove dead copper, pour order 12): 57,41.5 58.9,43.4 58.9,47.7 55.8,47.7 55.8,39.5 57,39.5
NetTEC2_2 on Top Layer "NETTEC2_2_L01_P014" (solid, remove dead copper, pour order 14): 55.7,47.7 52.9,47.7 52.9,39.6 54.5,39.6 54.5,42.7 55.7,43.9
12V on Top Layer "12V_L01_P018" (solid, remove dead copper, pour order 18): 20.867,26.835 23.467,26.835 23.467,25.835 24.067,25.235 26.067,25.235 26.067,23.035 20.867,23.035
GND1 on Top Layer "GND1_L01_P020" (solid, remove dead copper, pour order 20): 29.1,-0.271 29.1,14.1 20.7,22.5 20.7,49.7 -0.1,49.7 0,49.6 0,-0.271
PGND on Top Layer "PGND_L01_P022" (solid, remove dead copper, pour order 22): 20.9,49.6 20.9,27.033 25.733,27.033 34.7,36 70,36 70,49.6

## Silkscreen, mask and mechanical layers (free items; w line width, h text height)
Top Overlay:
  text "- +" at 25.8,39.4 h1.52
  text "GND" at 50.8,3.6 h1.52 r90
  text "SWCLK" at 53.2,3.6 h1.52 r90
  text "SWDIO" at 55.9,3.6 h1.52 r90
  text "NRST" at 58.3,3.6 h1.52 r90
  text "3V3" at 60.9,3.6 h1.52 r90
  text "GND" at 48.2,3.5 h1.52 r90
Bottom Overlay:
  rectangle: 21.1,12 68.4,29.2
  text "uPCR: TEC Controller Module rev1" at 68.4,32.6 h1.52
  text "2019/11/20" at 68.4,29.9 h1.52
Mechanical 1:
  lines w0.254: 0,2.5 ccw(c2.5,2.5) 2.5,0 67.5,0 ccw(c67.5,2.5) 70,2.5 70,46.775 ccw(c66.775,46.775) 66.775,50 3.414,50 ccw(c3.414,46.586) 0,46.586 0,2.5

## Text inside footprints (layer, text, board x,y; h text height)
J1: Top Overlay "1" at 8.087,31.197 h1.27 r270; Top Overlay "2" at 13.421,32.721 h1.27 r270; Top Overlay "7" at 8.087,37.293 h1.27 r270; Top Overlay "8" at 13.421,38.563 h1.27 r270; Top Overlay "9" at 14.691,42.119 h1.27 r270; Top Overlay "11" at 14.691,30.943 h1.27 r270
J2: Top Overlay "1" at 8.087,11.165 h1.27 r270; Top Overlay "2" at 13.421,12.689 h1.27 r270; Top Overlay "7" at 8.087,17.261 h1.27 r270; Top Overlay "8" at 13.421,18.531 h1.27 r270; Top Overlay "9" at 14.691,22.087 h1.27 r270; Top Overlay "11" at 14.691,10.911 h1.27 r270